# EAGLE board nano2 (EAGLE 7.1.0)
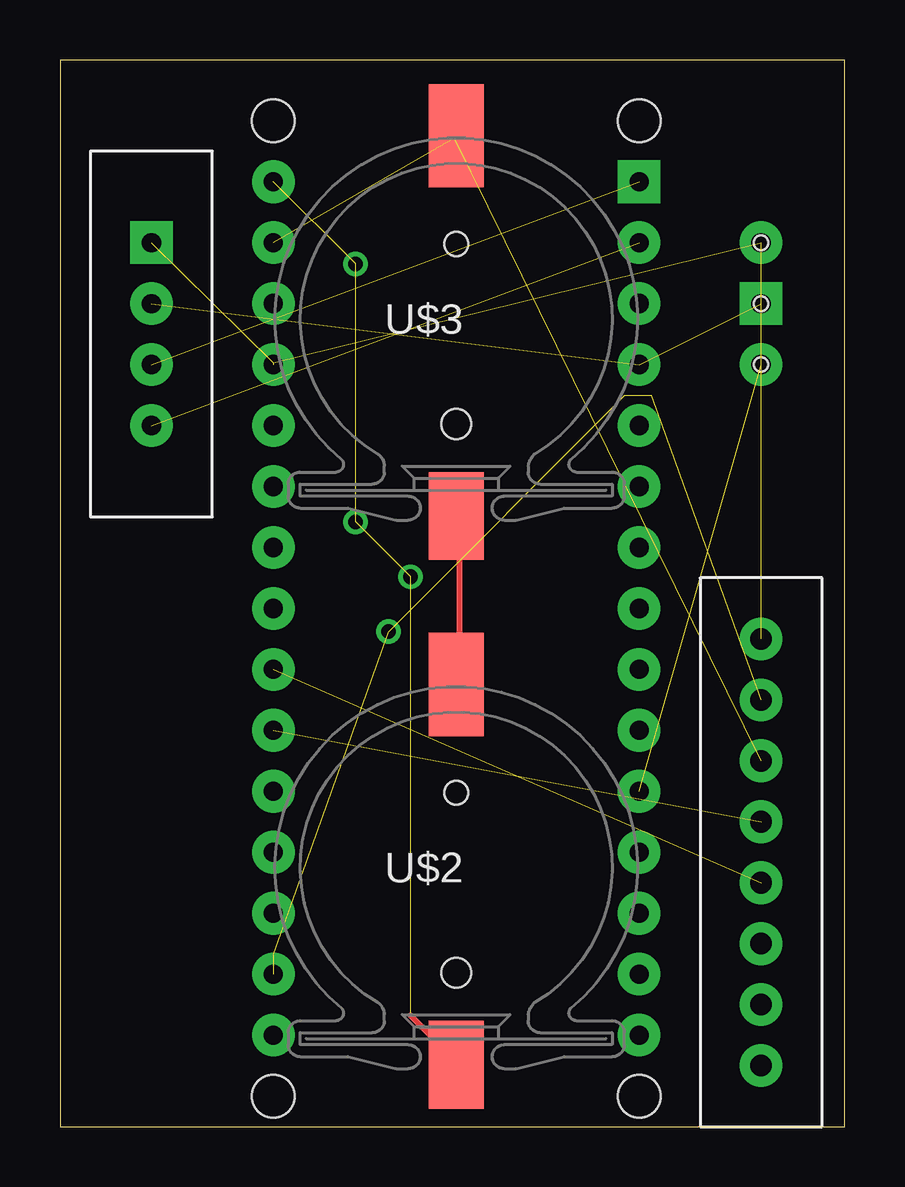
[diagram p0: board, top side]
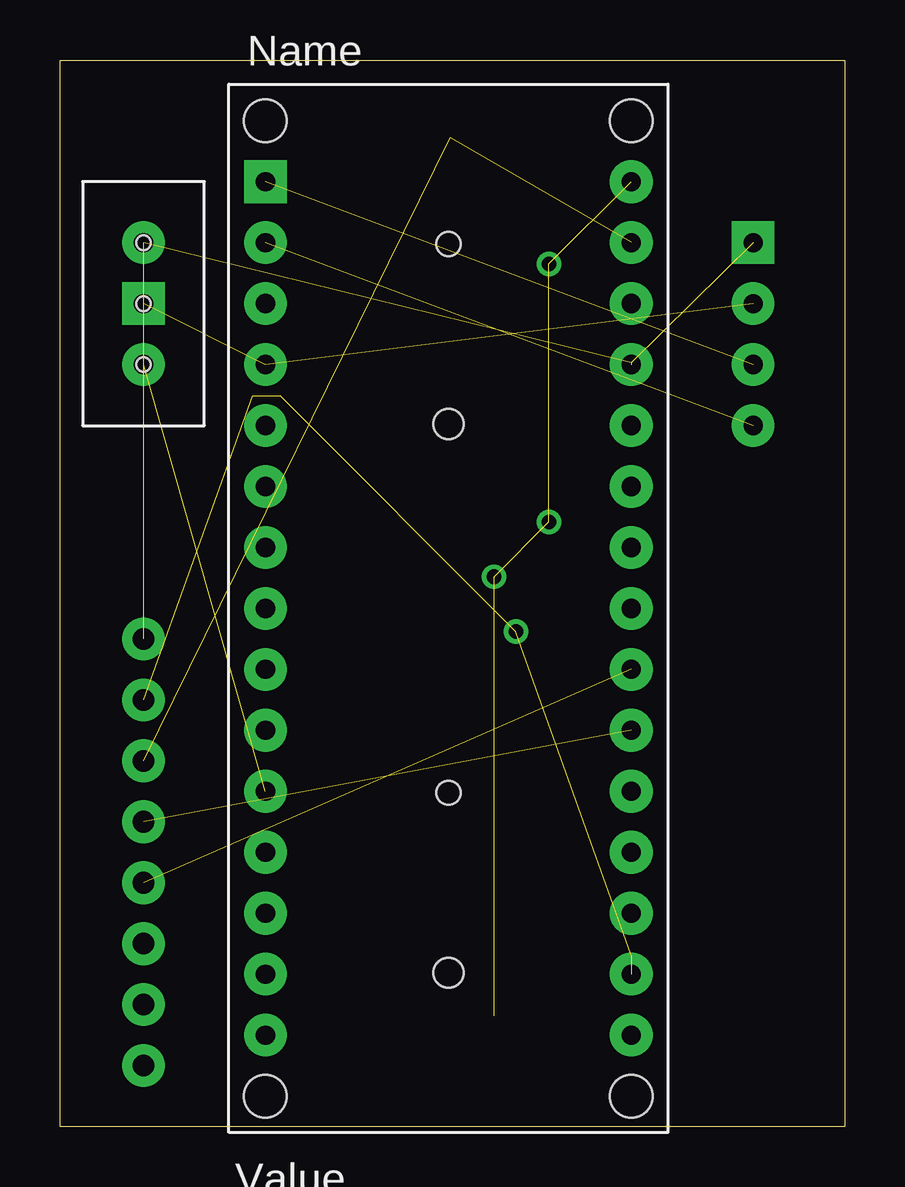
[diagram p1: board, bottom side, seen from below]

Size 32.69 x 44.44 mm. Coordinates in mm from the lower left corner, seen from the top.
Outline: 0,0 32.69,0 32.69,44.44 0,44.44 0,0
Copper layers (1*16): Top 0.035mm / dielectric 1.5mm / Bottom 0.035mm
Design rules "default": minimum track width 10mil, minimum drill 24mil, track to track 8mil, track to pad 8mil, pad to pad 8mil, via to via 8mil, smd to smd 8mil, copper to edge 40mil, drill to drill 8mil, minimum pad ring 10mil, minimum via ring 8mil, stop-mask expansion 4mil, vias tented up to drill 0mil, thermal gap 10mil

## Footprints (pad centres in the part's own frame; a part is rotated, then mirrored left to right if it is on the bottom)
PDIP-32 = drill 0.8 pad 1.778: 3V3 15.24,-35.56; +5V 15.24,-10.16; A0 15.24,-12.7; A1 15.24,-15.24; A2 15.24,-17.78; A3 15.24,-20.32; A4 15.24,-22.86; A5 15.24,-25.4; A6 15.24,-27.94; A7 15.24,-30.48; AREF 15.24,-33.02; D0/RX 0,-5.08; D2 0,-12.7; D3 0,-15.24; D4 0,-17.78; D5 0,-20.32; D6 0,-22.86; D7 0,-25.4; D8 0,-27.94; D9 0,-30.48; D10 0,-33.02; D11 0,-35.56; D12 0,-38.1; D13 15.24,-38.1; GND 0,-10.16; GND1 15.24,-5.08; RESET 0,-7.62; RESET1 15.24,-7.62; VIN 15.24,-2.54 | drill 0.8 pad 1.778 square: D1/TX 0,-2.54 | hole 1.778: 0,0; 0,-40.64; 15.24,-40.64; 15.24,0
HARWIN-CR1220 = smd 2.3 x 4.3: NEG 0,8.26 | smd 2.3 x 3.66: POS 0,-7.58 | hole 1: 0,3.75 | hole 1.25: 0,-3.75
GY85 = drill 0.9 pad 1.778: 3.3V 0,6.35; A_INT 0,-6.35; G_INT 0,-8.89; GND 0,3.81; M_DRDY 0,-3.81; SCL 0,1.27; SDA 0,-1.27; VCC_IN 0,8.89
HC06 = drill 0.8 pad 1.778: GND 0,-2.54; RXD 0,2.54; TXD 0,0 | drill 0.8 pad 1.778 square: VCC 0,-5.08
KEY_SMALL = drill 0.8 pad 1.778: DAT 0,-2.54; VCC 0,2.54 | drill 0.8 pad 1.778 square: GND 0,0 | hole 0.6: 0,2.54; 0,0; 0,-2.54

## Placement (x,y rotation side)
U$1  ARDUINONANO  [PDIP-32]  24.13,41.91 0 bottom
U$2  CR1220-HOLDER  [HARWIN-CR1220]  16.51,10.16 0 top
U$3  CR1220-HOLDER  [HARWIN-CR1220]  16.51,33.02 0 top
U$4  GY85  [GY85]  29.21,11.43 0 top
U$5  HC06  [HC06]  3.81,31.75 180 top
U$7  KEY_SMALL  [KEY_SMALL]  29.21,34.29 0 bottom

## Library data of the parts
U$1 = jet-lib
U$2 U$3 = battery-holder
U$4 U$5 U$7 = RMQLIFE

## Nets
N$1: U$1.+5V U$4.VCC_IN U$5.VCC U$7.VCC
N$2: U$1.VIN U$2.POS
N$3: U$1.GND1 U$3.NEG U$4.GND
N$4: U$1.3V3 U$4.3.3V
N$5: U$1.GND U$5.GND U$7.GND
N$6: U$1.D8 U$7.DAT
N$7: U$2.NEG U$3.POS
N$8: U$1.D1/TX U$5.TXD
N$9: U$1.D0/RX U$5.RXD
N$11: U$1.A5 U$4.SCL
N$12: U$1.A4 U$4.SDA

## Tracks (layer width: path | path; a pad name or v marks a point on that pad's centre or on a via)
N$1  (4 unrouted)
N$2  (via drill 0.61)  (4 unrouted)
  Top 0.254: 14.61,4.62 16.43,2.79 U$2.POS
  other vias: 12.32,35.94 12.32,25.2 14.61,22.91
N$3  (2 unrouted)
  Top 0.254: 16.43,41.2 U$3.NEG | 8.89,36.85 U$1.GND1
  Bottom 0.254: 8.89,36.63 U$1.GND1
N$4  (via drill 0.61)  (5 unrouted)
  other vias: 13.69,20.62
N$5  (2 unrouted)
N$6  (1 unrouted)
N$7
  Top 0.254: U$3.POS 16.66,25.42 16.66,18.57 U$2.NEG
N$8  (1 unrouted)
N$9  (1 unrouted)
N$11  (1 unrouted)
N$12  (1 unrouted)